# Altium PCB Copy of ANT-F-2.4G-FR4.PcbDoc (part 3 of 3)
Units mil, origin at the board's own origin, x right, y up, seen from the top; angles counter-clockwise.
Board outline 8878.9 x 2863.35 mil, 2 copper layers (Top Layer, Bottom Layer); 99 components, 48 nets, 825 pads, 1430 vias.
Unrouted connection lines stored in the file: 96.
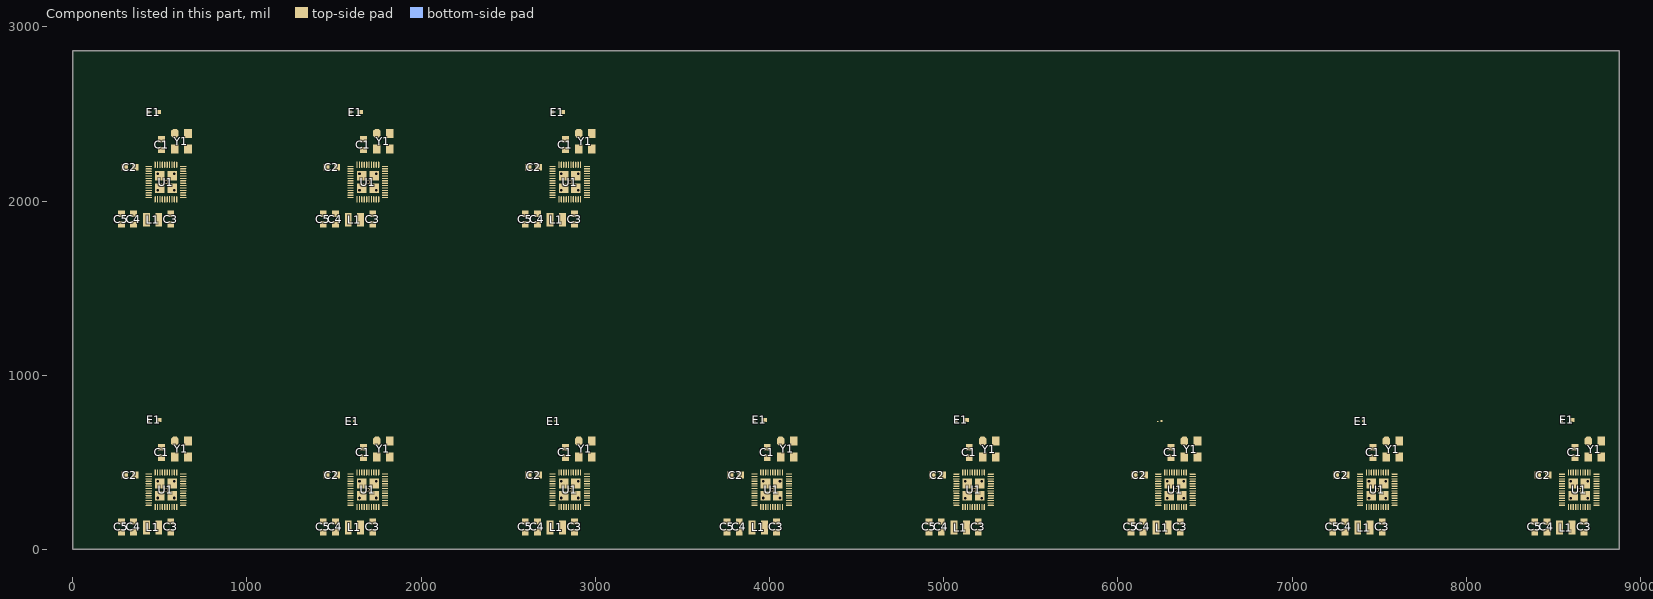
[diagram p3: the components of this part, seen from the top]

## Silkscreen, mask and mechanical layers (free items; w line width, h text height) (continued)
Mechanical 1:
  lines w15: 0,0 0,977.56 765.37,977.56 765.37,0 0,0 ; 0,1766.3 0,2743.87 765.37,2743.87 765.37,1766.3 0,1766.3 ; 1159.08,0 1924.45,0 1924.45,977.56 1159.08,977.56 1159.08,0 ; 1159.08,1766.3 1924.45,1766.3 1924.45,2743.87 1159.08,2743.87 1159.08,1766.3 ; 2318.15,0 2318.15,977.56 3083.52,977.56 3083.52,0 2318.15,0 ; 2318.15,1766.3 2318.15,2743.87 3083.52,2743.87 3083.52,1766.3 2318.15,1766.3 ; 3477.23,0 4242.6,0 4242.6,977.56 3477.23,977.56 3477.23,0 ; 4636.3,-0.33 4636.3,977.23 5401.68,977.23 5401.68,-0.33 4636.3,-0.33 ; 5795.38,-0.33 6560.75,-0.33 6560.75,977.23 5795.38,977.23 5795.38,-0.33 ; 6954.45,-0.33 6954.45,977.23 7719.83,977.23 7719.83,-0.33 6954.45,-0.33 ; 8113.53,-0.33 8878.9,-0.33 8878.9,977.23 8113.53,977.23 8113.53,-0.33